# EAGLE board led_board (EAGLE 9.5.2)
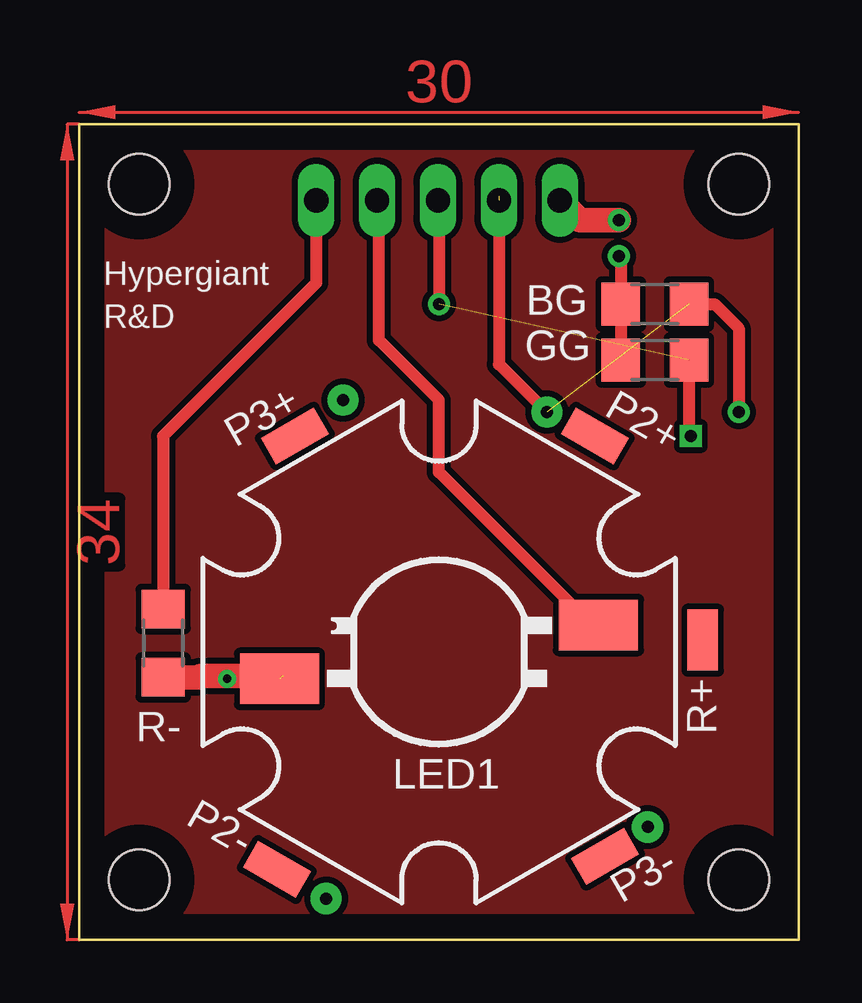
[diagram p0: board, top side]
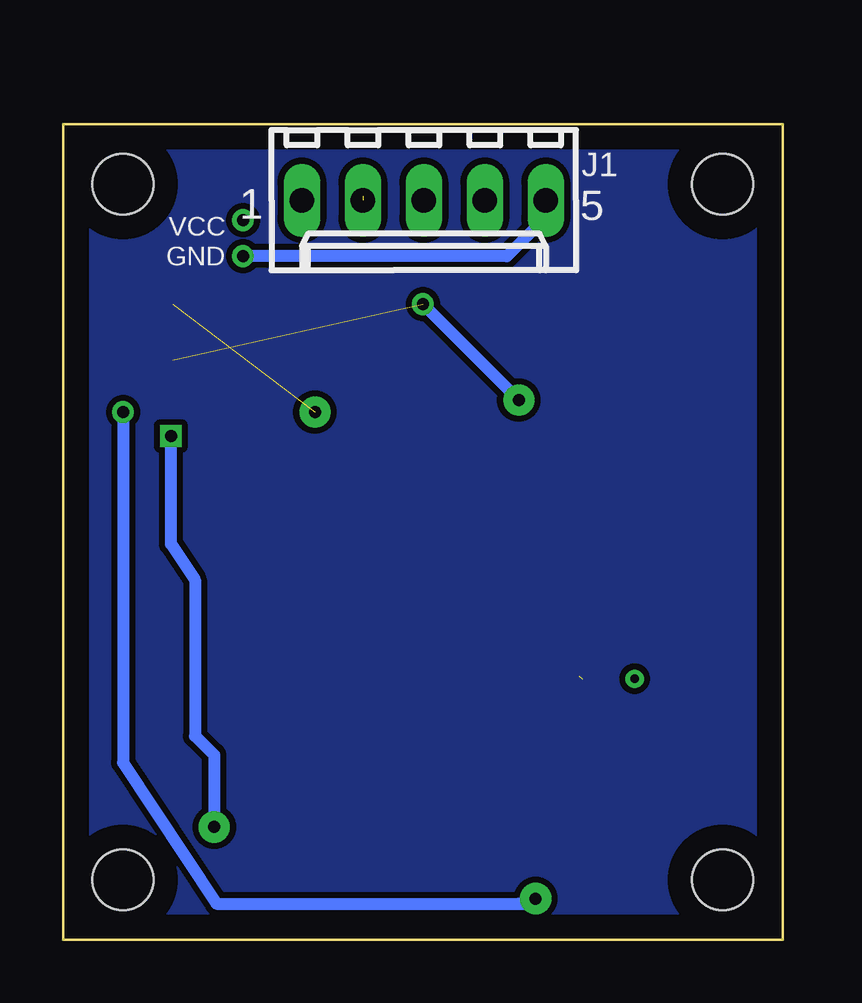
[diagram p1: board, bottom side, seen from below]

Size 30 x 34 mm. Coordinates in mm from the lower left corner, seen from the top.
Outline: 0,34 30,34 30,0 0,0 0,34
Copper layers (1*16): Top 0.035mm / dielectric 1.5mm / Bottom 0.035mm
Design rules "default": minimum track width 6mil, minimum drill 0.35mm, track to track 6mil, track to pad 6mil, pad to pad 6mil, via to via 6mil, smd to smd 6mil, copper to edge 40mil, drill to drill 6mil, minimum pad ring 10mil, minimum via ring 8mil, stop-mask expansion 4mil, vias tented up to drill 0mil, thermal gap 10mil
Holes 2.54 mm at 2.5,31.5 2.5,2.5 27.5,2.5 27.5,31.5

## Footprints (pad centres in the part's own frame; a part is rotated, then mirrored left to right if it is on the bottom)
R1206 = smd 1.6 x 1.803: 1 -1.422,0; 2 1.422,0
6410-05 = drill 1.016 long: 1 5.08,0; 2 2.54,0; 3 0,0; 4 -2.54,0; 5 -5.08,0
Z-POWER-LED-PCB-TYPE = smd 3.3 x 2.1: A -6.65,-1.12; C 6.65,1.12
SMD1,27-2,54 = smd 1.27 x 2.54: 1 0,0

## Placement (x,y rotation side)
BG  [R1206]  24,26.5 0 top
GG  [R1206]  24,24.16 0 top
J1  22-27-2051-05  [6410-05]  14.96,30.83 180 bottom
LED1  Z-POWER-LED  [Z-POWER-LED-PCB-TYPE]  15,12 180 top
P2+  [SMD1,27-2,54]  21.5,21 240 top
P2-  [SMD1,27-2,54]  8.25,2.93 60 top
P3+  [SMD1,27-2,54]  9,21 300 top
P3-  [SMD1,27-2,54]  21.92,3.48 120 top
R+  [SMD1,27-2,54]  26,12.5 180 top
R-  [R1206]  3.5,12.37 270 top

## Library data of the parts
BG GG R- = rcl; SPICEPREFIX: R
J1 = con-molex; MF: MOLEX; OC_FARNELL: unknown; OC_NEWARK: unknown
LED1 = led
P2+ P2- P3+ P3- R+ = wirepad

## Nets
B: BG.2 J1.2
G: GG.2 J1.3
GND: BG.1 GG.1 J1.5 R-.1
N$5: LED1.C R-.2
R: J1.4 LED1.A
VCC: J1.1

## Tracks (layer width: path | path; a pad name or v marks a point on that pad's centre or on a via)
B  (via drill 0.5, 0.5 pad 1.3)  (2 unrouted)
  Top 0.5: 25.08,27 BG.2 26.5,26.5 27.5,25.5 v27.5,22 | 17.5,31 17.5,24
  Top 0.508: 17.5,24 v19.5,22
  Bottom 0.5: v27.5,22 27.5,7.38 23.6,1.5 11,1.5
  Bottom 0.508: 11,1.5 10.52,1.5 v10.3,1.72
B_GND_POUR
  pour Bottom (isolate 0.254): 0,34 0,0 30,0 30,34
G  (via drill 0.5, 0.5 pad 1.3)  (1 unrouted)
  Top 0.5: 15,30.79 v15,26.5 | v25.5,21 25.43,21.07 GG.2
  Top 0.508: J1.3 15,30.79
  Bottom 0.5: v25.5,21 25.5,16.5 24.5,15 24.5,8.5 23.72,7.72
  Bottom 0.508: v15,26.5 v11,22.5 | 23.72,7.72 23.7,7.7 v23.7,4.7
GND  (via drill 0.5)
  Top 0.5: J1.5 9.88,27.38 3.5,21 R-.1 | v22.5,28.5 22.58,28.42 BG.1 GG.1
  Bottom 0.5: J1.5 9.88,30.12 11.5,28.5 v22.5,28.5
N$5  (via drill 0.35)  (1 unrouted)
  Top 0.5: LED1.C v6.17,10.88
  Top 1.016: R-.2 5,10.94 5.06,11 8.5,11
R
  Top 0.5: LED1.A 21.38,13.12 15,19.5 15,22.5 12.5,25 12.5,30.75 J1.4
T_GND_POUR
  pour Top (isolate 0.254): 0,34 30,34 30,0 0,0
VCC  (via drill 0.5)
  Top 1.016: J1.1 20.87,30 v22.5,30
(copper drawn outside any net)
  shapes: Top area x2

## Text on the board
tNames: Hypergiant / R&D
bNames: VCC | GND